# EAGLE board cameraCableBoardPanelized (EAGLE 9.4.2)
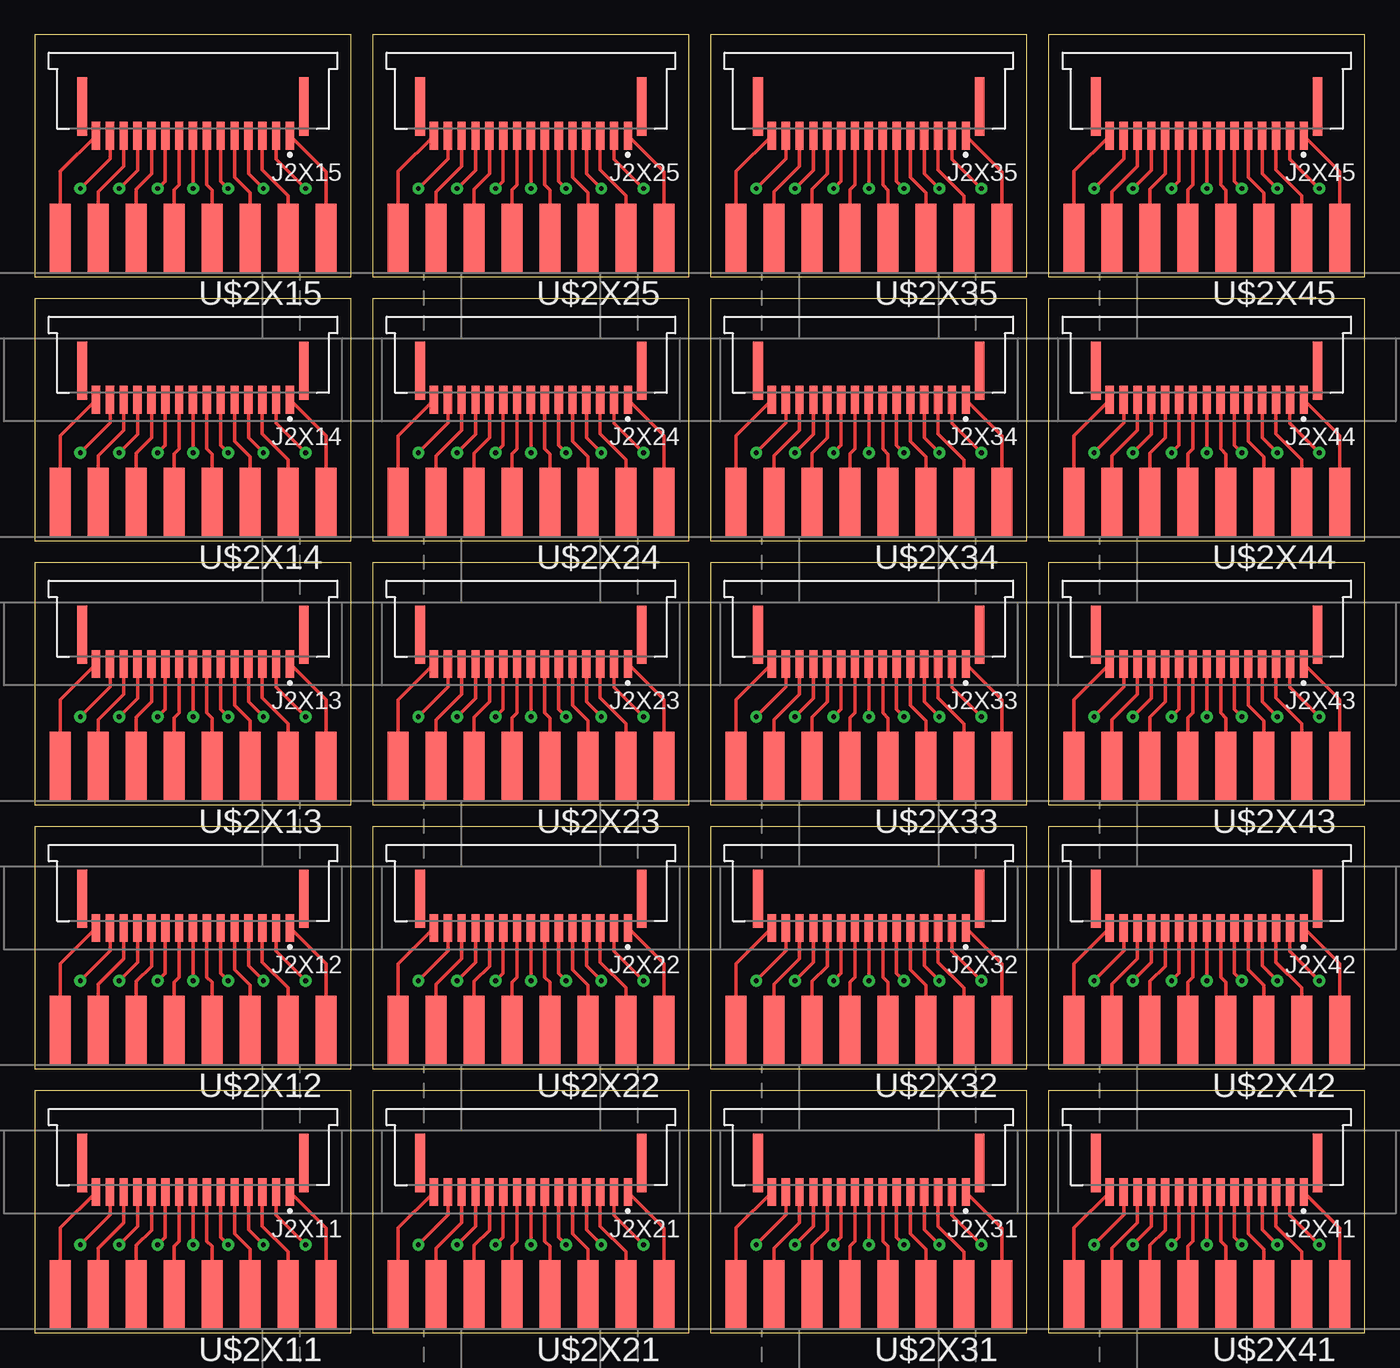
[diagram p0: board, top side]
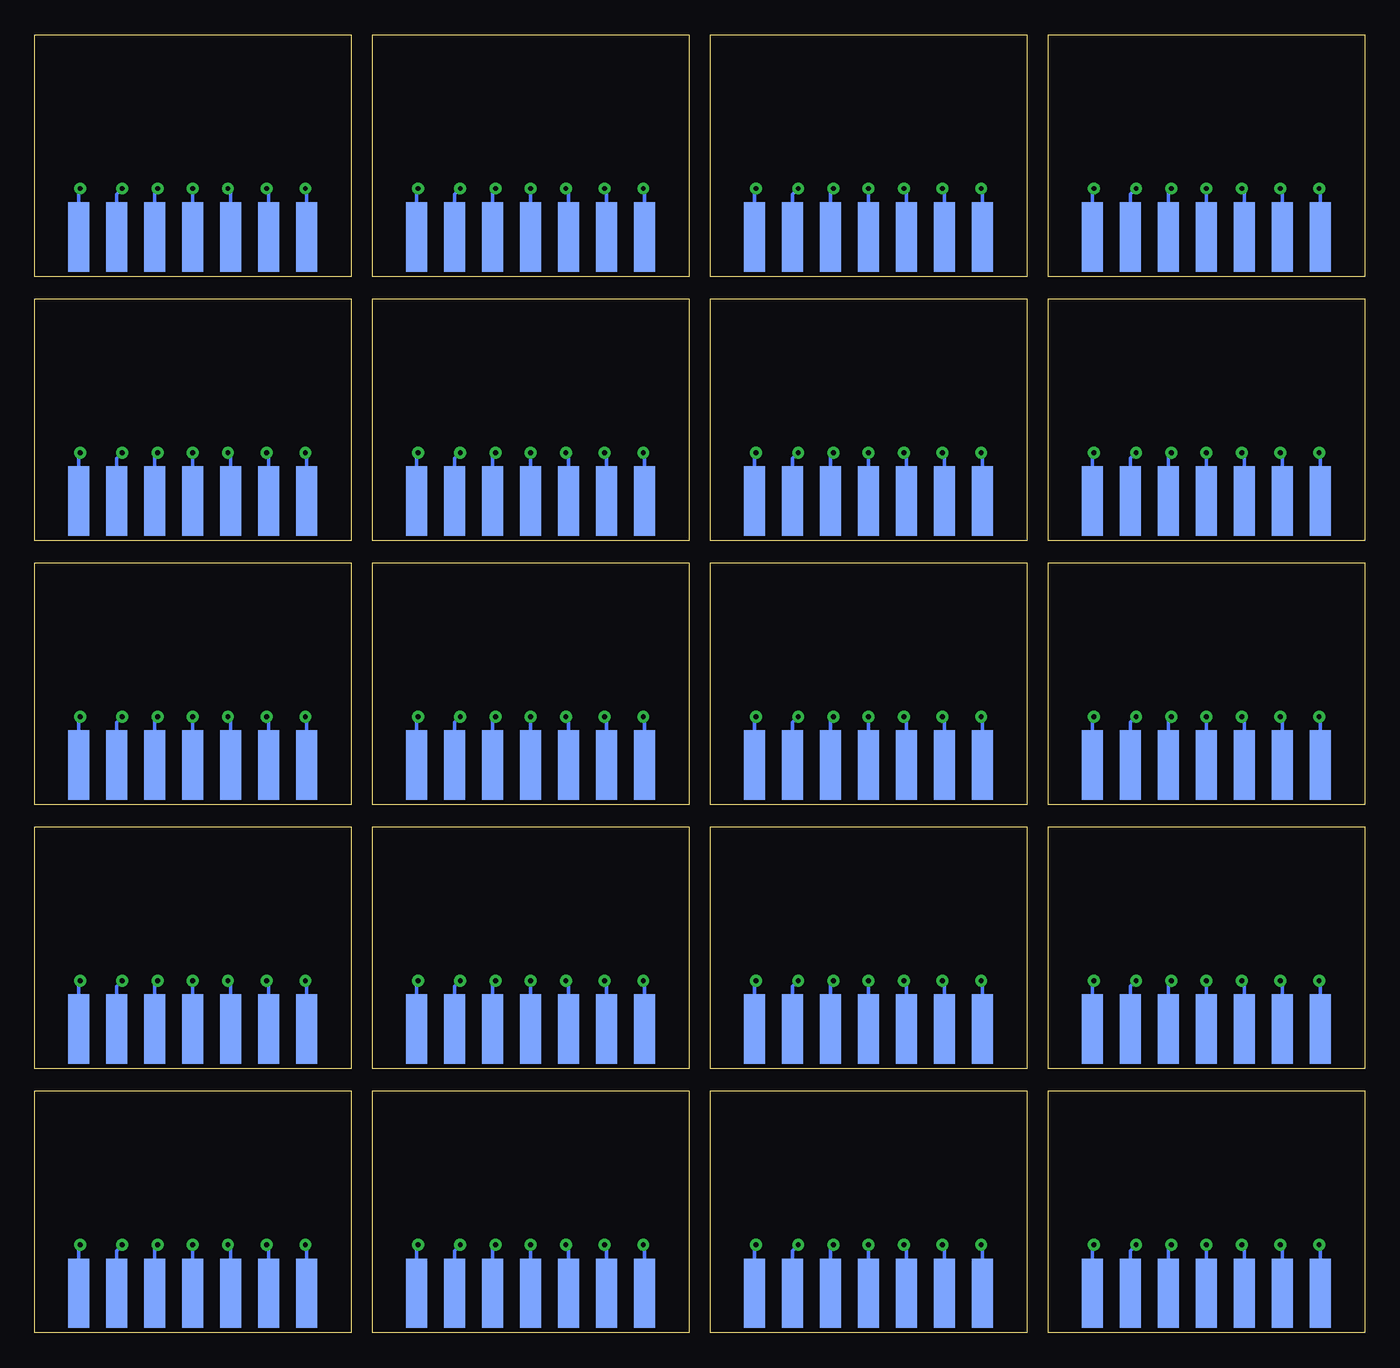
[diagram p1: board, bottom side, seen from below]

Size 95.99 x 93.65 mm. Coordinates in mm from the lower left corner, seen from the top.
Outline: 0,0 22.84,0 22.84,17.45 0,17.45 0,0
Outline: 0,19.05 22.84,19.05 22.84,36.5 0,36.5 0,19.05
Outline: 0,38.1 22.84,38.1 22.84,55.55 0,55.55 0,38.1
Outline: 0,57.15 22.84,57.15 22.84,74.6 0,74.6 0,57.15
Outline: 0,76.2 22.84,76.2 22.84,93.65 0,93.65 0,76.2
Outline: 24.38,0 47.22,0 47.22,17.45 24.38,17.45 24.38,0
Outline: 24.38,19.05 47.22,19.05 47.22,36.5 24.38,36.5 24.38,19.05
Outline: 24.38,38.1 47.22,38.1 47.22,55.55 24.38,55.55 24.38,38.1
Outline: 24.38,57.15 47.22,57.15 47.22,74.6 24.38,74.6 24.38,57.15
Outline: 24.38,76.2 47.22,76.2 47.22,93.65 24.38,93.65 24.38,76.2
Outline: 48.77,0 71.61,0 71.61,17.45 48.77,17.45 48.77,0
Outline: 48.77,19.05 71.61,19.05 71.61,36.5 48.77,36.5 48.77,19.05
Outline: 48.77,38.1 71.61,38.1 71.61,55.55 48.77,55.55 48.77,38.1
Outline: 48.77,57.15 71.61,57.15 71.61,74.6 48.77,74.6 48.77,57.15
Outline: 48.77,76.2 71.61,76.2 71.61,93.65 48.77,93.65 48.77,76.2
Outline: 73.15,0 95.99,0 95.99,17.45 73.15,17.45 73.15,0
Outline: 73.15,19.05 95.99,19.05 95.99,36.5 73.15,36.5 73.15,19.05
Outline: 73.15,38.1 95.99,38.1 95.99,55.55 73.15,55.55 73.15,38.1
Outline: 73.15,57.15 95.99,57.15 95.99,74.6 73.15,74.6 73.15,57.15
Outline: 73.15,76.2 95.99,76.2 95.99,93.65 73.15,93.65 73.15,76.2
Copper layers (1*16): Top 0.035mm / dielectric 1.5mm / Bottom 0.035mm
Design rules "SparkFun-2-layer-STANDARD_13milDrill": minimum track width 10mil, minimum drill 13mil, track to track 10mil, track to pad 8mil, pad to pad 8mil, via to via 10mil, smd to smd 8mil, copper to edge 8mil, drill to drill 8mil, minimum pad ring 10mil, minimum via ring 10mil, stop-mask expansion 4mil, vias tented up to drill 25mil, thermal gap 10mil

## Footprints (pad centres in the part's own frame; a part is rotated, then mirrored left to right if it is on the bottom)
AMPHENOL_SFW15R-1STE1LF = smd 0.6 x 2: 1 -7,0; 2 -6,0; 3 -5,0; 4 -4,0; 5 -3,0; 6 -2,0; 7 -1,0; 8 0,0; 9 1,0; 10 2,0; 11 3,0; 12 4,0; 13 5,0; 14 6,0; 15 7,0 | smd 0.7 x 4.2: S1 -8,-2.1; S2 8,-2.1
DB15-BOARD-EDGE = smd 1.5 x 5: P1 9.58,-2.5; P2 6.84,-2.5; P3 4.1,-2.5; P4 1.36,-2.5; P5 -1.38,-2.5; P6 -4.12,-2.5; P7 -6.86,-2.5; P8 -9.6,-2.5 | smd 1.5 x 5 bottom: P9 8.21,-2.61; P10 5.47,-2.61; P11 2.73,-2.61; P12 -0.01,-2.61; P13 -2.75,-2.61; P14 -5.49,-2.61; P15 -8.23,-2.61

## Placement (x,y rotation side)
J2X11  [AMPHENOL_SFW15R-1STE1LF]  11.43,10.16 180 top
J2X12  [AMPHENOL_SFW15R-1STE1LF]  11.43,29.21 180 top
J2X13  [AMPHENOL_SFW15R-1STE1LF]  11.43,48.26 180 top
J2X14  [AMPHENOL_SFW15R-1STE1LF]  11.43,67.31 180 top
J2X15  [AMPHENOL_SFW15R-1STE1LF]  11.43,86.36 180 top
J2X21  [AMPHENOL_SFW15R-1STE1LF]  35.81,10.16 180 top
J2X22  [AMPHENOL_SFW15R-1STE1LF]  35.81,29.21 180 top
J2X23  [AMPHENOL_SFW15R-1STE1LF]  35.81,48.26 180 top
J2X24  [AMPHENOL_SFW15R-1STE1LF]  35.81,67.31 180 top
J2X25  [AMPHENOL_SFW15R-1STE1LF]  35.81,86.36 180 top
J2X31  [AMPHENOL_SFW15R-1STE1LF]  60.2,10.16 180 top
J2X32  [AMPHENOL_SFW15R-1STE1LF]  60.2,29.21 180 top
J2X33  [AMPHENOL_SFW15R-1STE1LF]  60.2,48.26 180 top
J2X34  [AMPHENOL_SFW15R-1STE1LF]  60.2,67.31 180 top
J2X35  [AMPHENOL_SFW15R-1STE1LF]  60.2,86.36 180 top
J2X41  [AMPHENOL_SFW15R-1STE1LF]  84.58,10.16 180 top
J2X42  [AMPHENOL_SFW15R-1STE1LF]  84.58,29.21 180 top
J2X43  [AMPHENOL_SFW15R-1STE1LF]  84.58,48.26 180 top
J2X44  [AMPHENOL_SFW15R-1STE1LF]  84.58,67.31 180 top
J2X45  [AMPHENOL_SFW15R-1STE1LF]  84.58,86.36 180 top
U$2X11  [DB15-BOARD-EDGE]  11.43,0.25 180 top
U$2X12  [DB15-BOARD-EDGE]  11.43,19.3 180 top
U$2X13  [DB15-BOARD-EDGE]  11.43,38.35 180 top
U$2X14  [DB15-BOARD-EDGE]  11.43,57.4 180 top
U$2X15  [DB15-BOARD-EDGE]  11.43,76.45 180 top
U$2X21  [DB15-BOARD-EDGE]  35.81,0.25 180 top
U$2X22  [DB15-BOARD-EDGE]  35.81,19.3 180 top
U$2X23  [DB15-BOARD-EDGE]  35.81,38.35 180 top
U$2X24  [DB15-BOARD-EDGE]  35.81,57.4 180 top
U$2X25  [DB15-BOARD-EDGE]  35.81,76.45 180 top
U$2X31  [DB15-BOARD-EDGE]  60.2,0.25 180 top
U$2X32  [DB15-BOARD-EDGE]  60.2,19.3 180 top
U$2X33  [DB15-BOARD-EDGE]  60.2,38.35 180 top
U$2X34  [DB15-BOARD-EDGE]  60.2,57.4 180 top
U$2X35  [DB15-BOARD-EDGE]  60.2,76.45 180 top
U$2X41  [DB15-BOARD-EDGE]  84.58,0.25 180 top
U$2X42  [DB15-BOARD-EDGE]  84.58,19.3 180 top
U$2X43  [DB15-BOARD-EDGE]  84.58,38.35 180 top
U$2X44  [DB15-BOARD-EDGE]  84.58,57.4 180 top
U$2X45  [DB15-BOARD-EDGE]  84.58,76.45 180 top

## Library data of the parts
J2X11-J2X15 J2X21-J2X25 J2X31-J2X35 J2X41-J2X45 U$2X11-U$2X15 U$2X21-U$2X25 U$2X31-U$2X35 U$2X41-U$2X45 = RPi-Parts

## Nets
CAM1X11: J2X11.1 U$2X11.P8
CAM1X12: J2X12.1 U$2X12.P8
CAM1X13: J2X13.1 U$2X13.P8
CAM1X14: J2X14.1 U$2X14.P8
CAM1X15: J2X15.1 U$2X15.P8
CAM1X21: J2X21.1 U$2X21.P8
CAM1X22: J2X22.1 U$2X22.P8
CAM1X23: J2X23.1 U$2X23.P8
CAM1X24: J2X24.1 U$2X24.P8
CAM1X25: J2X25.1 U$2X25.P8
CAM1X31: J2X31.1 U$2X31.P8
CAM1X32: J2X32.1 U$2X32.P8
CAM1X33: J2X33.1 U$2X33.P8
CAM1X34: J2X34.1 U$2X34.P8
CAM1X35: J2X35.1 U$2X35.P8
CAM1X41: J2X41.1 U$2X41.P8
CAM1X42: J2X42.1 U$2X42.P8
CAM1X43: J2X43.1 U$2X43.P8
CAM1X44: J2X44.1 U$2X44.P8
CAM1X45: J2X45.1 U$2X45.P8
CAM2X11: J2X11.2 U$2X11.P15
CAM2X12: J2X12.2 U$2X12.P15
CAM2X13: J2X13.2 U$2X13.P15
CAM2X14: J2X14.2 U$2X14.P15
CAM2X15: J2X15.2 U$2X15.P15
CAM2X21: J2X21.2 U$2X21.P15
CAM2X22: J2X22.2 U$2X22.P15
CAM2X23: J2X23.2 U$2X23.P15
CAM2X24: J2X24.2 U$2X24.P15
CAM2X25: J2X25.2 U$2X25.P15
CAM2X31: J2X31.2 U$2X31.P15
CAM2X32: J2X32.2 U$2X32.P15
CAM2X33: J2X33.2 U$2X33.P15
CAM2X34: J2X34.2 U$2X34.P15
CAM2X35: J2X35.2 U$2X35.P15
CAM2X41: J2X41.2 U$2X41.P15
CAM2X42: J2X42.2 U$2X42.P15
CAM2X43: J2X43.2 U$2X43.P15
CAM2X44: J2X44.2 U$2X44.P15
CAM2X45: J2X45.2 U$2X45.P15
CAM3X11: J2X11.3 U$2X11.P7
CAM3X12: J2X12.3 U$2X12.P7
CAM3X13: J2X13.3 U$2X13.P7
CAM3X14: J2X14.3 U$2X14.P7
CAM3X15: J2X15.3 U$2X15.P7
CAM3X21: J2X21.3 U$2X21.P7
CAM3X22: J2X22.3 U$2X22.P7
CAM3X23: J2X23.3 U$2X23.P7
CAM3X24: J2X24.3 U$2X24.P7
CAM3X25: J2X25.3 U$2X25.P7
CAM3X31: J2X31.3 U$2X31.P7
CAM3X32: J2X32.3 U$2X32.P7
CAM3X33: J2X33.3 U$2X33.P7
CAM3X34: J2X34.3 U$2X34.P7
CAM3X35: J2X35.3 U$2X35.P7
CAM3X41: J2X41.3 U$2X41.P7
CAM3X42: J2X42.3 U$2X42.P7
CAM3X43: J2X43.3 U$2X43.P7
CAM3X44: J2X44.3 U$2X44.P7
CAM3X45: J2X45.3 U$2X45.P7
CAM4X11: J2X11.4 U$2X11.P14
CAM4X12: J2X12.4 U$2X12.P14
CAM4X13: J2X13.4 U$2X13.P14
CAM4X14: J2X14.4 U$2X14.P14
CAM4X15: J2X15.4 U$2X15.P14
CAM4X21: J2X21.4 U$2X21.P14
CAM4X22: J2X22.4 U$2X22.P14
CAM4X23: J2X23.4 U$2X23.P14
CAM4X24: J2X24.4 U$2X24.P14
CAM4X25: J2X25.4 U$2X25.P14
CAM4X31: J2X31.4 U$2X31.P14
CAM4X32: J2X32.4 U$2X32.P14
CAM4X33: J2X33.4 U$2X33.P14
CAM4X34: J2X34.4 U$2X34.P14
CAM4X35: J2X35.4 U$2X35.P14
CAM4X41: J2X41.4 U$2X41.P14
CAM4X42: J2X42.4 U$2X42.P14
CAM4X43: J2X43.4 U$2X43.P14
CAM4X44: J2X44.4 U$2X44.P14
CAM4X45: J2X45.4 U$2X45.P14
CAM5X11: J2X11.5 U$2X11.P6
CAM5X12: J2X12.5 U$2X12.P6
CAM5X13: J2X13.5 U$2X13.P6
CAM5X14: J2X14.5 U$2X14.P6
CAM5X15: J2X15.5 U$2X15.P6
CAM5X21: J2X21.5 U$2X21.P6
CAM5X22: J2X22.5 U$2X22.P6
CAM5X23: J2X23.5 U$2X23.P6
CAM5X24: J2X24.5 U$2X24.P6
CAM5X25: J2X25.5 U$2X25.P6
CAM5X31: J2X31.5 U$2X31.P6
CAM5X32: J2X32.5 U$2X32.P6
CAM5X33: J2X33.5 U$2X33.P6
CAM5X34: J2X34.5 U$2X34.P6
CAM5X35: J2X35.5 U$2X35.P6
CAM5X41: J2X41.5 U$2X41.P6
CAM5X42: J2X42.5 U$2X42.P6
CAM5X43: J2X43.5 U$2X43.P6
CAM5X44: J2X44.5 U$2X44.P6
CAM5X45: J2X45.5 U$2X45.P6
CAM6X11: J2X11.6 U$2X11.P13
CAM6X12: J2X12.6 U$2X12.P13
CAM6X13: J2X13.6 U$2X13.P13
CAM6X14: J2X14.6 U$2X14.P13
CAM6X15: J2X15.6 U$2X15.P13
CAM6X21: J2X21.6 U$2X21.P13
CAM6X22: J2X22.6 U$2X22.P13
CAM6X23: J2X23.6 U$2X23.P13
CAM6X24: J2X24.6 U$2X24.P13
CAM6X25: J2X25.6 U$2X25.P13
CAM6X31: J2X31.6 U$2X31.P13
CAM6X32: J2X32.6 U$2X32.P13
CAM6X33: J2X33.6 U$2X33.P13
CAM6X34: J2X34.6 U$2X34.P13
CAM6X35: J2X35.6 U$2X35.P13
CAM6X41: J2X41.6 U$2X41.P13
CAM6X42: J2X42.6 U$2X42.P13
CAM6X43: J2X43.6 U$2X43.P13
CAM6X44: J2X44.6 U$2X44.P13
CAM6X45: J2X45.6 U$2X45.P13
CAM7X11: J2X11.7 U$2X11.P5
CAM7X12: J2X12.7 U$2X12.P5
CAM7X13: J2X13.7 U$2X13.P5
CAM7X14: J2X14.7 U$2X14.P5
CAM7X15: J2X15.7 U$2X15.P5
CAM7X21: J2X21.7 U$2X21.P5
CAM7X22: J2X22.7 U$2X22.P5
CAM7X23: J2X23.7 U$2X23.P5
CAM7X24: J2X24.7 U$2X24.P5
CAM7X25: J2X25.7 U$2X25.P5
CAM7X31: J2X31.7 U$2X31.P5
CAM7X32: J2X32.7 U$2X32.P5
CAM7X33: J2X33.7 U$2X33.P5
CAM7X34: J2X34.7 U$2X34.P5
CAM7X35: J2X35.7 U$2X35.P5
CAM7X41: J2X41.7 U$2X41.P5
CAM7X42: J2X42.7 U$2X42.P5
CAM7X43: J2X43.7 U$2X43.P5
CAM7X44: J2X44.7 U$2X44.P5
CAM7X45: J2X45.7 U$2X45.P5
CAM8X11: J2X11.8 U$2X11.P12
CAM8X12: J2X12.8 U$2X12.P12
CAM8X13: J2X13.8 U$2X13.P12
CAM8X14: J2X14.8 U$2X14.P12
CAM8X15: J2X15.8 U$2X15.P12
CAM8X21: J2X21.8 U$2X21.P12
CAM8X22: J2X22.8 U$2X22.P12
CAM8X23: J2X23.8 U$2X23.P12
CAM8X24: J2X24.8 U$2X24.P12
CAM8X25: J2X25.8 U$2X25.P12
CAM8X31: J2X31.8 U$2X31.P12
CAM8X32: J2X32.8 U$2X32.P12
CAM8X33: J2X33.8 U$2X33.P12
CAM8X34: J2X34.8 U$2X34.P12
CAM8X35: J2X35.8 U$2X35.P12
CAM8X41: J2X41.8 U$2X41.P12
CAM8X42: J2X42.8 U$2X42.P12
CAM8X43: J2X43.8 U$2X43.P12
CAM8X44: J2X44.8 U$2X44.P12
CAM8X45: J2X45.8 U$2X45.P12
CAM9X11: J2X11.9 U$2X11.P4
CAM9X12: J2X12.9 U$2X12.P4
CAM9X13: J2X13.9 U$2X13.P4
CAM9X14: J2X14.9 U$2X14.P4
CAM9X15: J2X15.9 U$2X15.P4
CAM9X21: J2X21.9 U$2X21.P4
CAM9X22: J2X22.9 U$2X22.P4
CAM9X23: J2X23.9 U$2X23.P4
CAM9X24: J2X24.9 U$2X24.P4
CAM9X25: J2X25.9 U$2X25.P4
CAM9X31: J2X31.9 U$2X31.P4
CAM9X32: J2X32.9 U$2X32.P4
CAM9X33: J2X33.9 U$2X33.P4
CAM9X34: J2X34.9 U$2X34.P4
CAM9X35: J2X35.9 U$2X35.P4
CAM9X41: J2X41.9 U$2X41.P4
CAM9X42: J2X42.9 U$2X42.P4
CAM9X43: J2X43.9 U$2X43.P4
CAM9X44: J2X44.9 U$2X44.P4
CAM9X45: J2X45.9 U$2X45.P4
CAM10X11: J2X11.10 U$2X11.P11
CAM10X12: J2X12.10 U$2X12.P11
CAM10X13: J2X13.10 U$2X13.P11
CAM10X14: J2X14.10 U$2X14.P11
CAM10X15: J2X15.10 U$2X15.P11
CAM10X21: J2X21.10 U$2X21.P11
CAM10X22: J2X22.10 U$2X22.P11
CAM10X23: J2X23.10 U$2X23.P11
CAM10X24: J2X24.10 U$2X24.P11
CAM10X25: J2X25.10 U$2X25.P11
CAM10X31: J2X31.10 U$2X31.P11
CAM10X32: J2X32.10 U$2X32.P11
CAM10X33: J2X33.10 U$2X33.P11
CAM10X34: J2X34.10 U$2X34.P11
CAM10X35: J2X35.10 U$2X35.P11
CAM10X41: J2X41.10 U$2X41.P11
CAM10X42: J2X42.10 U$2X42.P11
CAM10X43: J2X43.10 U$2X43.P11
CAM10X44: J2X44.10 U$2X44.P11
CAM10X45: J2X45.10 U$2X45.P11
CAM11X11: J2X11.11 U$2X11.P3
CAM11X12: J2X12.11 U$2X12.P3
CAM11X13: J2X13.11 U$2X13.P3
CAM11X14: J2X14.11 U$2X14.P3
CAM11X15: J2X15.11 U$2X15.P3
CAM11X21: J2X21.11 U$2X21.P3
CAM11X22: J2X22.11 U$2X22.P3
CAM11X23: J2X23.11 U$2X23.P3
CAM11X24: J2X24.11 U$2X24.P3
CAM11X25: J2X25.11 U$2X25.P3
CAM11X31: J2X31.11 U$2X31.P3
CAM11X32: J2X32.11 U$2X32.P3
CAM11X33: J2X33.11 U$2X33.P3
CAM11X34: J2X34.11 U$2X34.P3
CAM11X35: J2X35.11 U$2X35.P3
CAM11X41: J2X41.11 U$2X41.P3
CAM11X42: J2X42.11 U$2X42.P3
CAM11X43: J2X43.11 U$2X43.P3
CAM11X44: J2X44.11 U$2X44.P3
CAM11X45: J2X45.11 U$2X45.P3
CAM12X11: J2X11.12 U$2X11.P10
CAM12X12: J2X12.12 U$2X12.P10
CAM12X13: J2X13.12 U$2X13.P10
CAM12X14: J2X14.12 U$2X14.P10
CAM12X15: J2X15.12 U$2X15.P10
CAM12X21: J2X21.12 U$2X21.P10
CAM12X22: J2X22.12 U$2X22.P10
CAM12X23: J2X23.12 U$2X23.P10
CAM12X24: J2X24.12 U$2X24.P10
CAM12X25: J2X25.12 U$2X25.P10
CAM12X31: J2X31.12 U$2X31.P10
CAM12X32: J2X32.12 U$2X32.P10
CAM12X33: J2X33.12 U$2X33.P10
CAM12X34: J2X34.12 U$2X34.P10
CAM12X35: J2X35.12 U$2X35.P10
CAM12X41: J2X41.12 U$2X41.P10
CAM12X42: J2X42.12 U$2X42.P10
CAM12X43: J2X43.12 U$2X43.P10
CAM12X44: J2X44.12 U$2X44.P10
CAM12X45: J2X45.12 U$2X45.P10
CAM13X11: J2X11.13 U$2X11.P2
CAM13X12: J2X12.13 U$2X12.P2
CAM13X13: J2X13.13 U$2X13.P2
CAM13X14: J2X14.13 U$2X14.P2
CAM13X15: J2X15.13 U$2X15.P2
CAM13X21: J2X21.13 U$2X21.P2
CAM13X22: J2X22.13 U$2X22.P2
CAM13X23: J2X23.13 U$2X23.P2
CAM13X24: J2X24.13 U$2X24.P2
CAM13X25: J2X25.13 U$2X25.P2
CAM13X31: J2X31.13 U$2X31.P2
CAM13X32: J2X32.13 U$2X32.P2
CAM13X33: J2X33.13 U$2X33.P2
CAM13X34: J2X34.13 U$2X34.P2
CAM13X35: J2X35.13 U$2X35.P2
CAM13X41: J2X41.13 U$2X41.P2
CAM13X42: J2X42.13 U$2X42.P2
CAM13X43: J2X43.13 U$2X43.P2
CAM13X44: J2X44.13 U$2X44.P2
CAM13X45: J2X45.13 U$2X45.P2
CAM14X11: J2X11.14 U$2X11.P9
CAM14X12: J2X12.14 U$2X12.P9
CAM14X13: J2X13.14 U$2X13.P9
CAM14X14: J2X14.14 U$2X14.P9
CAM14X15: J2X15.14 U$2X15.P9
CAM14X21: J2X21.14 U$2X21.P9
CAM14X22: J2X22.14 U$2X22.P9
CAM14X23: J2X23.14 U$2X23.P9
CAM14X24: J2X24.14 U$2X24.P9
CAM14X25: J2X25.14 U$2X25.P9
CAM14X31: J2X31.14 U$2X31.P9
CAM14X32: J2X32.14 U$2X32.P9
CAM14X33: J2X33.14 U$2X33.P9
CAM14X34: J2X34.14 U$2X34.P9
CAM14X35: J2X35.14 U$2X35.P9
CAM14X41: J2X41.14 U$2X41.P9
CAM14X42: J2X42.14 U$2X42.P9
CAM14X43: J2X43.14 U$2X43.P9
CAM14X44: J2X44.14 U$2X44.P9
CAM14X45: J2X45.14 U$2X45.P9
CAM15X11: J2X11.15 U$2X11.P1
CAM15X12: J2X12.15 U$2X12.P1
CAM15X13: J2X13.15 U$2X13.P1
CAM15X14: J2X14.15 U$2X14.P1
CAM15X15: J2X15.15 U$2X15.P1
CAM15X21: J2X21.15 U$2X21.P1
CAM15X22: J2X22.15 U$2X22.P1
CAM15X23: J2X23.15 U$2X23.P1
CAM15X24: J2X24.15 U$2X24.P1
CAM15X25: J2X25.15 U$2X25.P1
CAM15X31: J2X31.15 U$2X31.P1
CAM15X32: J2X32.15 U$2X32.P1
CAM15X33: J2X33.15 U$2X33.P1
CAM15X34: J2X34.15 U$2X34.P1
CAM15X35: J2X35.15 U$2X35.P1
CAM15X41: J2X41.15 U$2X41.P1
CAM15X42: J2X42.15 U$2X42.P1
CAM15X43: J2X43.15 U$2X43.P1
CAM15X44: J2X44.15 U$2X44.P1
CAM15X45: J2X45.15 U$2X45.P1

## Tracks (layer width: path | path; a pad name or v marks a point on that pad's centre or on a via)
CAM1X11
  Top 0.254: U$2X11.P8 21.03,7.56 J2X11.1
CAM1X12
  Top 0.254: U$2X12.P8 21.03,26.61 J2X12.1
CAM1X13
  Top 0.254: U$2X13.P8 21.03,45.66 J2X13.1
CAM1X14
  Top 0.254: U$2X14.P8 21.03,64.71 J2X14.1
CAM1X15
  Top 0.254: U$2X15.P8 21.03,83.76 J2X15.1
CAM1X21
  Top 0.254: U$2X21.P8 45.41,7.56 J2X21.1
CAM1X22
  Top 0.254: U$2X22.P8 45.41,26.61 J2X22.1
CAM1X23
  Top 0.254: U$2X23.P8 45.41,45.66 J2X23.1
CAM1X24
  Top 0.254: U$2X24.P8 45.41,64.71 J2X24.1
CAM1X25
  Top 0.254: U$2X25.P8 45.41,83.76 J2X25.1
CAM1X31
  Top 0.254: U$2X31.P8 69.8,7.56 J2X31.1
CAM1X32
  Top 0.254: U$2X32.P8 69.8,26.61 J2X32.1
CAM1X33
  Top 0.254: U$2X33.P8 69.8,45.66 J2X33.1
CAM1X34
  Top 0.254: U$2X34.P8 69.8,64.71 J2X34.1
CAM1X35
  Top 0.254: U$2X35.P8 69.8,83.76 J2X35.1
CAM1X41
  Top 0.254: U$2X41.P8 94.18,7.56 J2X41.1
CAM1X42
  Top 0.254: U$2X42.P8 94.18,26.61 J2X42.1
CAM1X43
  Top 0.254: U$2X43.P8 94.18,45.66 J2X43.1
CAM1X44
  Top 0.254: U$2X44.P8 94.18,64.71 J2X44.1
CAM1X45
  Top 0.254: U$2X45.P8 94.18,83.76 J2X45.1
CAM2X11  (via drill 0.35 pad 0.86)
  Top 0.254: v19.56,6.35 17.43,8.48 J2X11.2
  Bottom 0.254: U$2X11.P15 19.66,6.25 v19.56,6.35
CAM2X12  (via drill 0.35 pad 0.86)
  Top 0.254: v19.56,25.4 17.43,27.53 J2X12.2
  Bottom 0.254: U$2X12.P15 19.66,25.3 v19.56,25.4
CAM2X13  (via drill 0.35 pad 0.86)
  Top 0.254: v19.56,44.45 17.43,46.58 J2X13.2
  Bottom 0.254: U$2X13.P15 19.66,44.35 v19.56,44.45
CAM2X14  (via drill 0.35 pad 0.86)
  Top 0.254: v19.56,63.5 17.43,65.63 J2X14.2
  Bottom 0.254: U$2X14.P15 19.66,63.4 v19.56,63.5
CAM2X15  (via drill 0.35 pad 0.86)
  Top 0.254: v19.56,82.55 17.43,84.68 J2X15.2
  Bottom 0.254: U$2X15.P15 19.66,82.45 v19.56,82.55
CAM2X21  (via drill 0.35 pad 0.86)
  Top 0.254: v43.94,6.35 41.81,8.48 J2X21.2
  Bottom 0.254: U$2X21.P15 44.04,6.25 v43.94,6.35
CAM2X22  (via drill 0.35 pad 0.86)
  Top 0.254: v43.94,25.4 41.81,27.53 J2X22.2
  Bottom 0.254: U$2X22.P15 44.04,25.3 v43.94,25.4
CAM2X23  (via drill 0.35 pad 0.86)
  Top 0.254: v43.94,44.45 41.81,46.58 J2X23.2
  Bottom 0.254: U$2X23.P15 44.04,44.35 v43.94,44.45
CAM2X24  (via drill 0.35 pad 0.86)
  Top 0.254: v43.94,63.5 41.81,65.63 J2X24.2
  Bottom 0.254: U$2X24.P15 44.04,63.4 v43.94,63.5
CAM2X25  (via drill 0.35 pad 0.86)
  Top 0.254: v43.94,82.55 41.81,84.68 J2X25.2
  Bottom 0.254: U$2X25.P15 44.04,82.45 v43.94,82.55
CAM2X31  (via drill 0.35 pad 0.86)
  Top 0.254: v68.33,6.35 66.2,8.48 J2X31.2
  Bottom 0.254: U$2X31.P15 68.43,6.25 v68.33,6.35
CAM2X32  (via drill 0.35 pad 0.86)
  Top 0.254: v68.33,25.4 66.2,27.53 J2X32.2
  Bottom 0.254: U$2X32.P15 68.43,25.3 v68.33,25.4
CAM2X33  (via drill 0.35 pad 0.86)
  Top 0.254: v68.33,44.45 66.2,46.58 J2X33.2
  Bottom 0.254: U$2X33.P15 68.43,44.35 v68.33,44.45
CAM2X34  (via drill 0.35 pad 0.86)
  Top 0.254: v68.33,63.5 66.2,65.63 J2X34.2
  Bottom 0.254: U$2X34.P15 68.43,63.4 v68.33,63.5
CAM2X35  (via drill 0.35 pad 0.86)
  Top 0.254: v68.33,82.55 66.2,84.68 J2X35.2
  Bottom 0.254: U$2X35.P15 68.43,82.45 v68.33,82.55
CAM2X41  (via drill 0.35 pad 0.86)
  Top 0.254: v92.71,6.35 90.58,8.48 J2X41.2
  Bottom 0.254: U$2X41.P15 92.81,6.25 v92.71,6.35
CAM2X42  (via drill 0.35 pad 0.86)
  Top 0.254: v92.71,25.4 90.58,27.53 J2X42.2
  Bottom 0.254: U$2X42.P15 92.81,25.3 v92.71,25.4
CAM2X43  (via drill 0.35 pad 0.86)
  Top 0.254: v92.71,44.45 90.58,46.58 J2X43.2
  Bottom 0.254: U$2X43.P15 92.81,44.35 v92.71,44.45
CAM2X44  (via drill 0.35 pad 0.86)
  Top 0.254: v92.71,63.5 90.58,65.63 J2X44.2
  Bottom 0.254: U$2X44.P15 92.81,63.4 v92.71,63.5
CAM2X45  (via drill 0.35 pad 0.86)
  Top 0.254: v92.71,82.55 90.58,84.68 J2X45.2
  Bottom 0.254: U$2X45.P15 92.81,82.45 v92.71,82.55
CAM3X11
  Top 0.254: U$2X11.P7 18.29,5.84 16.43,7.7 J2X11.3
CAM3X12
  Top 0.254: U$2X12.P7 18.29,24.89 16.43,26.75 J2X12.3
CAM3X13
  Top 0.254: U$2X13.P7 18.29,43.94 16.43,45.8 J2X13.3
CAM3X14
  Top 0.254: U$2X14.P7 18.29,62.99 16.43,64.85 J2X14.3
CAM3X15
  Top 0.254: U$2X15.P7 18.29,82.04 16.43,83.9 J2X15.3
CAM3X21
  Top 0.254: U$2X21.P7 42.67,5.84 40.81,7.7 J2X21.3
CAM3X22
  Top 0.254: U$2X22.P7 42.67,24.89 40.81,26.75 J2X22.3
CAM3X23
  Top 0.254: U$2X23.P7 42.67,43.94 40.81,45.8 J2X23.3
CAM3X24
  Top 0.254: U$2X24.P7 42.67,62.99 40.81,64.85 J2X24.3
CAM3X25
  Top 0.254: U$2X25.P7 42.67,82.04 40.81,83.9 J2X25.3
CAM3X31
  Top 0.254: U$2X31.P7 67.06,5.84 65.2,7.7 J2X31.3
CAM3X32
  Top 0.254: U$2X32.P7 67.06,24.89 65.2,26.75 J2X32.3
CAM3X33
  Top 0.254: U$2X33.P7 67.06,43.94 65.2,45.8 J2X33.3
CAM3X34
  Top 0.254: U$2X34.P7 67.06,62.99 65.2,64.85 J2X34.3
CAM3X35
  Top 0.254: U$2X35.P7 67.06,82.04 65.2,83.9 J2X35.3
CAM3X41
  Top 0.254: U$2X41.P7 91.44,5.84 89.58,7.7 J2X41.3
CAM3X42
  Top 0.254: U$2X42.P7 91.44,24.89 89.58,26.75 J2X42.3
CAM3X43
  Top 0.254: U$2X43.P7 91.44,43.94 89.58,45.8 J2X43.3
CAM3X44
  Top 0.254: U$2X44.P7 91.44,62.99 89.58,64.85 J2X44.3
CAM3X45
  Top 0.254: U$2X45.P7 91.44,82.04 89.58,83.9 J2X45.3
CAM4X11  (via drill 0.35 pad 0.86)
  Top 0.254: v16.51,6.35 15.43,7.43 J2X11.4
  Bottom 0.254: U$2X11.P14 16.92,5.94 v16.51,6.35
CAM4X12  (via drill 0.35 pad 0.86)
  Top 0.254: v16.51,25.4 15.43,26.48 J2X12.4
  Bottom 0.254: U$2X12.P14 16.92,24.99 v16.51,25.4
CAM4X13  (via drill 0.35 pad 0.86)
  Top 0.254: v16.51,44.45 15.43,45.53 J2X13.4
  Bottom 0.254: U$2X13.P14 16.92,44.04 v16.51,44.45
CAM4X14  (via drill 0.35 pad 0.86)
  Top 0.254: v16.51,63.5 15.43,64.58 J2X14.4
  Bottom 0.254: U$2X14.P14 16.92,63.09 v16.51,63.5
CAM4X15  (via drill 0.35 pad 0.86)
  Top 0.254: v16.51,82.55 15.43,83.63 J2X15.4
  Bottom 0.254: U$2X15.P14 16.92,82.14 v16.51,82.55
CAM4X21  (via drill 0.35 pad 0.86)
  Top 0.254: v40.89,6.35 39.81,7.43 J2X21.4
  Bottom 0.254: U$2X21.P14 41.3,5.94 v40.89,6.35
CAM4X22  (via drill 0.35 pad 0.86)
  Top 0.254: v40.89,25.4 39.81,26.48 J2X22.4
  Bottom 0.254: U$2X22.P14 41.3,24.99 v40.89,25.4
CAM4X23  (via drill 0.35 pad 0.86)
  Top 0.254: v40.89,44.45 39.81,45.53 J2X23.4
  Bottom 0.254: U$2X23.P14 41.3,44.04 v40.89,44.45
CAM4X24  (via drill 0.35 pad 0.86)
  Top 0.254: v40.89,63.5 39.81,64.58 J2X24.4
  Bottom 0.254: U$2X24.P14 41.3,63.09 v40.89,63.5
CAM4X25  (via drill 0.35 pad 0.86)
  Top 0.254: v40.89,82.55 39.81,83.63 J2X25.4
  Bottom 0.254: U$2X25.P14 41.3,82.14 v40.89,82.55
CAM4X31  (via drill 0.35 pad 0.86)
  Top 0.254: v65.28,6.35 64.2,7.43 J2X31.4
  Bottom 0.254: U$2X31.P14 65.69,5.94 v65.28,6.35
CAM4X32  (via drill 0.35 pad 0.86)
  Top 0.254: v65.28,25.4 64.2,26.48 J2X32.4
  Bottom 0.254: U$2X32.P14 65.69,24.99 v65.28,25.4
CAM4X33  (via drill 0.35 pad 0.86)
  Top 0.254: v65.28,44.45 64.2,45.53 J2X33.4
  Bottom 0.254: U$2X33.P14 65.69,44.04 v65.28,44.45
CAM4X34  (via drill 0.35 pad 0.86)
  Top 0.254: v65.28,63.5 64.2,64.58 J2X34.4
  Bottom 0.254: U$2X34.P14 65.69,63.09 v65.28,63.5
CAM4X35  (via drill 0.35 pad 0.86)
  Top 0.254: v65.28,82.55 64.2,83.63 J2X35.4
  Bottom 0.254: U$2X35.P14 65.69,82.14 v65.28,82.55
CAM4X41  (via drill 0.35 pad 0.86)
  Top 0.254: v89.66,6.35 88.58,7.43 J2X41.4
  Bottom 0.254: U$2X41.P14 90.07,5.94 v89.66,6.35
CAM4X42  (via drill 0.35 pad 0.86)
  Top 0.254: v89.66,25.4 88.58,26.48 J2X42.4
  Bottom 0.254: U$2X42.P14 90.07,24.99 v89.66,25.4
CAM4X43  (via drill 0.35 pad 0.86)
  Top 0.254: v89.66,44.45 88.58,45.53 J2X43.4
  Bottom 0.254: U$2X43.P14 90.07,44.04 v89.66,44.45
CAM4X44  (via drill 0.35 pad 0.86)
  Top 0.254: v89.66,63.5 88.58,64.58 J2X44.4
  Bottom 0.254: U$2X44.P14 90.07,63.09 v89.66,63.5
CAM4X45  (via drill 0.35 pad 0.86)
  Top 0.254: v89.66,82.55 88.58,83.63 J2X45.4
  Bottom 0.254: U$2X45.P14 90.07,82.14 v89.66,82.55
CAM5X11
  Top 0.254: U$2X11.P6 15.55,6.04 14.43,7.16 J2X11.5
CAM5X12
  Top 0.254: U$2X12.P6 15.55,25.09 14.43,26.21 J2X12.5
CAM5X13
  Top 0.254: U$2X13.P6 15.55,44.14 14.43,45.26 J2X13.5
CAM5X14
  Top 0.254: U$2X14.P6 15.55,63.19 14.43,64.31 J2X14.5
CAM5X15
  Top 0.254: U$2X15.P6 15.55,82.24 14.43,83.36 J2X15.5
CAM5X21
  Top 0.254: U$2X21.P6 39.93,6.04 38.81,7.16 J2X21.5
CAM5X22
  Top 0.254: U$2X22.P6 39.93,25.09 38.81,26.21 J2X22.5
CAM5X23
  Top 0.254: U$2X23.P6 39.93,44.14 38.81,45.26 J2X23.5
CAM5X24
  Top 0.254: U$2X24.P6 39.93,63.19 38.81,64.31 J2X24.5
CAM5X25
  Top 0.254: U$2X25.P6 39.93,82.24 38.81,83.36 J2X25.5
CAM5X31
  Top 0.254: U$2X31.P6 64.32,6.04 63.2,7.16 J2X31.5
CAM5X32
  Top 0.254: U$2X32.P6 64.32,25.09 63.2,26.21 J2X32.5
CAM5X33
  Top 0.254: U$2X33.P6 64.32,44.14 63.2,45.26 J2X33.5
CAM5X34
  Top 0.254: U$2X34.P6 64.32,63.19 63.2,64.31 J2X34.5
CAM5X35
  Top 0.254: U$2X35.P6 64.32,82.24 63.2,83.36 J2X35.5
CAM5X41
  Top 0.254: U$2X41.P6 88.7,6.04 87.58,7.16 J2X41.5
CAM5X42
  Top 0.254: U$2X42.P6 88.7,25.09 87.58,26.21 J2X42.5
CAM5X43
  Top 0.254: U$2X43.P6 88.7,44.14 87.58,45.26 J2X43.5
CAM5X44
  Top 0.254: U$2X44.P6 88.7,63.19 87.58,64.31 J2X44.5
CAM5X45
  Top 0.254: U$2X45.P6 88.7,82.24 87.58,83.36 J2X45.5
CAM6X11  (via drill 0.35 pad 0.86)
  Top 0.254: v13.97,6.35 13.43,6.89 J2X11.6
  Bottom 0.254: U$2X11.P13 14.18,6.14 v13.97,6.35
CAM6X12  (via drill 0.35 pad 0.86)
  Top 0.254: v13.97,25.4 13.43,25.94 J2X12.6
  Bottom 0.254: U$2X12.P13 14.18,25.19 v13.97,25.4
CAM6X13  (via drill 0.35 pad 0.86)
  Top 0.254: v13.97,44.45 13.43,44.99 J2X13.6
  Bottom 0.254: U$2X13.P13 14.18,44.24 v13.97,44.45
CAM6X14  (via drill 0.35 pad 0.86)
  Top 0.254: v13.97,63.5 13.43,64.04 J2X14.6
  Bottom 0.254: U$2X14.P13 14.18,63.29 v13.97,63.5
CAM6X15  (via drill 0.35 pad 0.86)
  Top 0.254: v13.97,82.55 13.43,83.09 J2X15.6
  Bottom 0.254: U$2X15.P13 14.18,82.34 v13.97,82.55
CAM6X21  (via drill 0.35 pad 0.86)
  Top 0.254: v38.35,6.35 37.81,6.89 J2X21.6
  Bottom 0.254: U$2X21.P13 38.56,6.14 v38.35,6.35
CAM6X22  (via drill 0.35 pad 0.86)
  Top 0.254: v38.35,25.4 37.81,25.94 J2X22.6
  Bottom 0.254: U$2X22.P13 38.56,25.19 v38.35,25.4
CAM6X23  (via drill 0.35 pad 0.86)
  Top 0.254: v38.35,44.45 37.81,44.99 J2X23.6
  Bottom 0.254: U$2X23.P13 38.56,44.24 v38.35,44.45
CAM6X24  (via drill 0.35 pad 0.86)
  Top 0.254: v38.35,63.5 37.81,64.04 J2X24.6
  Bottom 0.254: U$2X24.P13 38.56,63.29 v38.35,63.5
CAM6X25  (via drill 0.35 pad 0.86)
  Top 0.254: v38.35,82.55 37.81,83.09 J2X25.6
  Bottom 0.254: U$2X25.P13 38.56,82.34 v38.35,82.55
CAM6X31  (via drill 0.35 pad 0.86)
  Top 0.254: v62.74,6.35 62.2,6.89 J2X31.6
  Bottom 0.254: U$2X31.P13 62.95,6.14 v62.74,6.35
CAM6X32  (via drill 0.35 pad 0.86)
  Top 0.254: v62.74,25.4 62.2,25.94 J2X32.6
  Bottom 0.254: U$2X32.P13 62.95,25.19 v62.74,25.4
CAM6X33  (via drill 0.35 pad 0.86)
  Top 0.254: v62.74,44.45 62.2,44.99 J2X33.6
  Bottom 0.254: U$2X33.P13 62.95,44.24 v62.74,44.45
CAM6X34  (via drill 0.35 pad 0.86)
  Top 0.254: v62.74,63.5 62.2,64.04 J2X34.6
  Bottom 0.254: U$2X34.P13 62.95,63.29 v62.74,63.5
CAM6X35  (via drill 0.35 pad 0.86)
  Top 0.254: v62.74,82.55 62.2,83.09 J2X35.6
  Bottom 0.254: U$2X35.P13 62.95,82.34 v62.74,82.55
CAM6X41  (via drill 0.35 pad 0.86)
  Top 0.254: v87.12,6.35 86.58,6.89 J2X41.6
  Bottom 0.254: U$2X41.P13 87.33,6.14 v87.12,6.35
CAM6X42  (via drill 0.35 pad 0.86)
  Top 0.254: v87.12,25.4 86.58,25.94 J2X42.6
  Bottom 0.254: U$2X42.P13 87.33,25.19 v87.12,25.4
CAM6X43  (via drill 0.35 pad 0.86)
  Top 0.254: v87.12,44.45 86.58,44.99 J2X43.6
  Bottom 0.254: U$2X43.P13 87.33,44.24 v87.12,44.45
CAM6X44  (via drill 0.35 pad 0.86)
  Top 0.254: v87.12,63.5 86.58,64.04 J2X44.6
  Bottom 0.254: U$2X44.P13 87.33,63.29 v87.12,63.5
CAM6X45  (via drill 0.35 pad 0.86)
  Top 0.254: v87.12,82.55 86.58,83.09 J2X45.6
  Bottom 0.254: U$2X45.P13 87.33,82.34 v87.12,82.55
CAM7X11
  Top 0.254: U$2X11.P5 12.81,6.24 12.43,6.62 J2X11.7
CAM7X12
  Top 0.254: U$2X12.P5 12.81,25.29 12.43,25.67 J2X12.7
CAM7X13
  Top 0.254: U$2X13.P5 12.81,44.34 12.43,44.72 J2X13.7
CAM7X14
  Top 0.254: U$2X14.P5 12.81,63.39 12.43,63.77 J2X14.7
CAM7X15
  Top 0.254: U$2X15.P5 12.81,82.44 12.43,82.82 J2X15.7
CAM7X21
  Top 0.254: U$2X21.P5 37.19,6.24 36.81,6.62 J2X21.7
CAM7X22
  Top 0.254: U$2X22.P5 37.19,25.29 36.81,25.67 J2X22.7
CAM7X23
  Top 0.254: U$2X23.P5 37.19,44.34 36.81,44.72 J2X23.7
CAM7X24
  Top 0.254: U$2X24.P5 37.19,63.39 36.81,63.77 J2X24.7
CAM7X25
  Top 0.254: U$2X25.P5 37.19,82.44 36.81,82.82 J2X25.7
CAM7X31
  Top 0.254: U$2X31.P5 61.58,6.24 61.2,6.62 J2X31.7
CAM7X32
  Top 0.254: U$2X32.P5 61.58,25.29 61.2,25.67 J2X32.7
CAM7X33
  Top 0.254: U$2X33.P5 61.58,44.34 61.2,44.72 J2X33.7
CAM7X34
  Top 0.254: U$2X34.P5 61.58,63.39 61.2,63.77 J2X34.7
CAM7X35
  Top 0.254: U$2X35.P5 61.58,82.44 61.2,82.82 J2X35.7
CAM7X41
  Top 0.254: U$2X41.P5 85.96,6.24 85.58,6.62 J2X41.7
CAM7X42
  Top 0.254: U$2X42.P5 85.96,25.29 85.58,25.67 J2X42.7
CAM7X43
  Top 0.254: U$2X43.P5 85.96,44.34 85.58,44.72 J2X43.7
CAM7X44
  Top 0.254: U$2X44.P5 85.96,63.39 85.58,63.77 J2X44.7
CAM7X45
  Top 0.254: U$2X45.P5 85.96,82.44 85.58,82.82 J2X45.7
CAM8X11  (via drill 0.35 pad 0.86)
  Top 0.254: v11.43,6.35 J2X11.8
  Bottom 0.254: U$2X11.P12 v11.44,6.34 v11.43,6.35
CAM8X12  (via drill 0.35 pad 0.86)
  Top 0.254: v11.43,25.4 J2X12.8
  Bottom 0.254: U$2X12.P12 v11.44,25.39 v11.43,25.4
CAM8X13  (via drill 0.35 pad 0.86)
  Top 0.254: v11.43,44.45 J2X13.8
  Bottom 0.254: U$2X13.P12 v11.44,44.44 v11.43,44.45
CAM8X14  (via drill 0.35 pad 0.86)
  Top 0.254: v11.43,63.5 J2X14.8
  Bottom 0.254: U$2X14.P12 v11.44,63.49 v11.43,63.5
CAM8X15  (via drill 0.35 pad 0.86)
  Top 0.254: v11.43,82.55 J2X15.8
  Bottom 0.254: U$2X15.P12 v11.44,82.54 v11.43,82.55
CAM8X21  (via drill 0.35 pad 0.86)
  Top 0.254: v35.81,6.35 J2X21.8
  Bottom 0.254: U$2X21.P12 35.82,6.34 v35.81,6.35
CAM8X22  (via drill 0.35 pad 0.86)
  Top 0.254: v35.81,25.4 J2X22.8
  Bottom 0.254: U$2X22.P12 35.82,25.39 v35.81,25.4
CAM8X23  (via drill 0.35 pad 0.86)
  Top 0.254: v35.81,44.45 J2X23.8
  Bottom 0.254: U$2X23.P12 35.82,44.44 v35.81,44.45
CAM8X24  (via drill 0.35 pad 0.86)
  Top 0.254: v35.81,63.5 J2X24.8
  Bottom 0.254: U$2X24.P12 35.82,63.49 v35.81,63.5
CAM8X25  (via drill 0.35 pad 0.86)
  Top 0.254: v35.81,82.55 J2X25.8
  Bottom 0.254: U$2X25.P12 35.82,82.54 v35.81,82.55
CAM8X31  (via drill 0.35 pad 0.86)
  Top 0.254: v60.2,6.35 J2X31.8
  Bottom 0.254: U$2X31.P12 v60.21,6.34 v60.2,6.35
CAM8X32  (via drill 0.35 pad 0.86)
  Top 0.254: v60.2,25.4 J2X32.8
  Bottom 0.254: U$2X32.P12 v60.21,25.39 v60.2,25.4
CAM8X33  (via drill 0.35 pad 0.86)
  Top 0.254: v60.2,44.45 J2X33.8
  Bottom 0.254: U$2X33.P12 v60.21,44.44 v60.2,44.45
CAM8X34  (via drill 0.35 pad 0.86)
  Top 0.254: v60.2,63.5 J2X34.8
  Bottom 0.254: U$2X34.P12 v60.21,63.49 v60.2,63.5
CAM8X35  (via drill 0.35 pad 0.86)
  Top 0.254: v60.2,82.55 J2X35.8
  Bottom 0.254: U$2X35.P12 v60.21,82.54 v60.2,82.55
CAM8X41  (via drill 0.35 pad 0.86)
  Top 0.254: v84.58,6.35 J2X41.8
  Bottom 0.254: U$2X41.P12 84.59,6.34 v84.58,6.35
CAM8X42  (via drill 0.35 pad 0.86)
  Top 0.254: v84.58,25.4 J2X42.8
  Bottom 0.254: U$2X42.P12 84.59,25.39 v84.58,25.4
CAM8X43  (via drill 0.35 pad 0.86)
  Top 0.254: v84.58,44.45 J2X43.8
  Bottom 0.254: U$2X43.P12 84.59,44.44 v84.58,44.45
CAM8X44  (via drill 0.35 pad 0.86)
  Top 0.254: v84.58,63.5 J2X44.8
  Bottom 0.254: U$2X44.P12 84.59,63.49 v84.58,63.5
CAM8X45  (via drill 0.35 pad 0.86)
  Top 0.254: v84.58,82.55 J2X45.8
  Bottom 0.254: U$2X45.P12 84.59,82.54 v84.58,82.55
CAM9X11
  Top 0.254: U$2X11.P4 10.07,6.26 10.43,6.62 J2X11.9
CAM9X12
  Top 0.254: U$2X12.P4 10.07,25.31 10.43,25.67 J2X12.9
CAM9X13
  Top 0.254: U$2X13.P4 10.07,44.36 10.43,44.72 J2X13.9
CAM9X14
  Top 0.254: U$2X14.P4 10.07,63.41 10.43,63.77 J2X14.9
CAM9X15
  Top 0.254: U$2X15.P4 10.07,82.46 10.43,82.82 J2X15.9
CAM9X21
  Top 0.254: U$2X21.P4 34.45,6.26 34.81,6.62 J2X21.9
CAM9X22
  Top 0.254: U$2X22.P4 34.45,25.31 34.81,25.67 J2X22.9
CAM9X23
  Top 0.254: U$2X23.P4 34.45,44.36 34.81,44.72 J2X23.9
CAM9X24
  Top 0.254: U$2X24.P4 34.45,63.41 34.81,63.77 J2X24.9
CAM9X25
  Top 0.254: U$2X25.P4 34.45,82.46 34.81,82.82 J2X25.9
CAM9X31
  Top 0.254: U$2X31.P4 58.84,6.26 59.2,6.62 J2X31.9
CAM9X32
  Top 0.254: U$2X32.P4 58.84,25.31 59.2,25.67 J2X32.9
CAM9X33
  Top 0.254: U$2X33.P4 58.84,44.36 59.2,44.72 J2X33.9
CAM9X34
  Top 0.254: U$2X34.P4 58.84,63.41 59.2,63.77 J2X34.9
CAM9X35
  Top 0.254: U$2X35.P4 58.84,82.46 59.2,82.82 J2X35.9
CAM9X41
  Top 0.254: U$2X41.P4 83.22,6.26 83.58,6.62 J2X41.9
CAM9X42
  Top 0.254: U$2X42.P4 83.22,25.31 83.58,25.67 J2X42.9
CAM9X43
  Top 0.254: U$2X43.P4 83.22,44.36 83.58,44.72 J2X43.9
CAM9X44
  Top 0.254: U$2X44.P4 83.22,63.41 83.58,63.77 J2X44.9
CAM9X45
  Top 0.254: U$2X45.P4 83.22,82.46 83.58,82.82 J2X45.9
CAM10X11  (via drill 0.35 pad 0.86)
  Top 0.254: v8.89,6.35 9.43,6.89 J2X11.10
  Bottom 0.254: U$2X11.P11 8.7,6.16 v8.89,6.35
CAM10X12  (via drill 0.35 pad 0.86)
  Top 0.254: v8.89,25.4 9.43,25.94 J2X12.10
  Bottom 0.254: U$2X12.P11 8.7,25.21 v8.89,25.4
CAM10X13  (via drill 0.35 pad 0.86)
  Top 0.254: v8.89,44.45 9.43,44.99 J2X13.10
  Bottom 0.254: U$2X13.P11 8.7,44.26 v8.89,44.45
CAM10X14  (via drill 0.35 pad 0.86)
  Top 0.254: v8.89,63.5 9.43,64.04 J2X14.10
  Bottom 0.254: U$2X14.P11 8.7,63.31 v8.89,63.5
CAM10X15  (via drill 0.35 pad 0.86)
  Top 0.254: v8.89,82.55 9.43,83.09 J2X15.10
  Bottom 0.254: U$2X15.P11 8.7,82.36 v8.89,82.55
CAM10X21  (via drill 0.35 pad 0.86)
  Top 0.254: v33.27,6.35 33.81,6.89 J2X21.10
  Bottom 0.254: U$2X21.P11 33.08,6.16 v33.27,6.35
CAM10X22  (via drill 0.35 pad 0.86)
  Top 0.254: v33.27,25.4 33.81,25.94 J2X22.10
  Bottom 0.254: U$2X22.P11 33.08,25.21 v33.27,25.4
CAM10X23  (via drill 0.35 pad 0.86)
  Top 0.254: v33.27,44.45 33.81,44.99 J2X23.10
  Bottom 0.254: U$2X23.P11 33.08,44.26 v33.27,44.45
CAM10X24  (via drill 0.35 pad 0.86)
  Top 0.254: v33.27,63.5 33.81,64.04 J2X24.10
  Bottom 0.254: U$2X24.P11 33.08,63.31 v33.27,63.5
CAM10X25  (via drill 0.35 pad 0.86)
  Top 0.254: v33.27,82.55 33.81,83.09 J2X25.10
  Bottom 0.254: U$2X25.P11 33.08,82.36 v33.27,82.55
CAM10X31  (via drill 0.35 pad 0.86)
  Top 0.254: v57.66,6.35 58.2,6.89 J2X31.10
  Bottom 0.254: U$2X31.P11 57.47,6.16 v57.66,6.35
CAM10X32  (via drill 0.35 pad 0.86)
  Top 0.254: v57.66,25.4 58.2,25.94 J2X32.10
  Bottom 0.254: U$2X32.P11 57.47,25.21 v57.66,25.4
CAM10X33  (via drill 0.35 pad 0.86)
  Top 0.254: v57.66,44.45 58.2,44.99 J2X33.10
  Bottom 0.254: U$2X33.P11 57.47,44.26 v57.66,44.45
CAM10X34  (via drill 0.35 pad 0.86)
  Top 0.254: v57.66,63.5 58.2,64.04 J2X34.10
  Bottom 0.254: U$2X34.P11 57.47,63.31 v57.66,63.5
CAM10X35  (via drill 0.35 pad 0.86)
  Top 0.254: v57.66,82.55 58.2,83.09 J2X35.10
  Bottom 0.254: U$2X35.P11 57.47,82.36 v57.66,82.55
CAM10X41  (via drill 0.35 pad 0.86)
  Top 0.254: v82.04,6.35 82.58,6.89 J2X41.10
  Bottom 0.254: U$2X41.P11 81.85,6.16 v82.04,6.35
CAM10X42  (via drill 0.35 pad 0.86)
  Top 0.254: v82.04,25.4 82.58,25.94 J2X42.10
  Bottom 0.254: U$2X42.P11 81.85,25.21 v82.04,25.4
CAM10X43  (via drill 0.35 pad 0.86)
  Top 0.254: v82.04,44.45 82.58,44.99 J2X43.10
  Bottom 0.254: U$2X43.P11 81.85,44.26 v82.04,44.45
CAM10X44  (via drill 0.35 pad 0.86)
  Top 0.254: v82.04,63.5 82.58,64.04 J2X44.10
  Bottom 0.254: U$2X44.P11 81.85,63.31 v82.04,63.5
CAM10X45  (via drill 0.35 pad 0.86)
  Top 0.254: v82.04,82.55 82.58,83.09 J2X45.10
  Bottom 0.254: U$2X45.P11 81.85,82.36 v82.04,82.55
CAM11X11
  Top 0.254: U$2X11.P3 7.33,6.31 8.43,7.41 J2X11.11
CAM11X12
  Top 0.254: U$2X12.P3 7.33,25.36 8.43,26.46 J2X12.11
CAM11X13
  Top 0.254: U$2X13.P3 7.33,44.41 8.43,45.51 J2X13.11
CAM11X14
  Top 0.254: U$2X14.P3 7.33,63.46 8.43,64.56 J2X14.11
CAM11X15
  Top 0.254: U$2X15.P3 7.33,82.51 8.43,83.61 J2X15.11
CAM11X21
  Top 0.254: U$2X21.P3 31.71,6.31 32.81,7.41 J2X21.11
CAM11X22
  Top 0.254: U$2X22.P3 31.71,25.36 32.81,26.46 J2X22.11
CAM11X23
  Top 0.254: U$2X23.P3 31.71,44.41 32.81,45.51 J2X23.11
CAM11X24
  Top 0.254: U$2X24.P3 31.71,63.46 32.81,64.56 J2X24.11
CAM11X25
  Top 0.254: U$2X25.P3 31.71,82.51 32.81,83.61 J2X25.11
CAM11X31
  Top 0.254: U$2X31.P3 56.1,6.31 57.2,7.41 J2X31.11
CAM11X32
  Top 0.254: U$2X32.P3 56.1,25.36 57.2,26.46 J2X32.11
CAM11X33
  Top 0.254: U$2X33.P3 56.1,44.41 57.2,45.51 J2X33.11
CAM11X34
  Top 0.254: U$2X34.P3 56.1,63.46 57.2,64.56 J2X34.11
CAM11X35
  Top 0.254: U$2X35.P3 56.1,82.51 57.2,83.61 J2X35.11
CAM11X41
  Top 0.254: U$2X41.P3 80.48,6.31 81.58,7.41 J2X41.11
CAM11X42
  Top 0.254: U$2X42.P3 80.48,25.36 81.58,26.46 J2X42.11
CAM11X43
  Top 0.254: U$2X43.P3 80.48,44.41 81.58,45.51 J2X43.11
CAM11X44
  Top 0.254: U$2X44.P3 80.48,63.46 81.58,64.56 J2X44.11
CAM11X45
  Top 0.254: U$2X45.P3 80.48,82.51 81.58,83.61 J2X45.11
CAM12X11  (via drill 0.35 pad 0.86)
  Top 0.254: v6.1,6.35 7.43,7.68 J2X11.12
  Bottom 0.254: U$2X11.P10 5.96,6.21 v6.1,6.35
CAM12X12  (via drill 0.35 pad 0.86)
  Top 0.254: v6.1,25.4 7.43,26.73 J2X12.12
  Bottom 0.254: U$2X12.P10 5.96,25.26 v6.1,25.4
CAM12X13  (via drill 0.35 pad 0.86)
  Top 0.254: v6.1,44.45 7.43,45.78 J2X13.12
  Bottom 0.254: U$2X13.P10 5.96,44.31 v6.1,44.45
CAM12X14  (via drill 0.35 pad 0.86)
  Top 0.254: v6.1,63.5 7.43,64.83 J2X14.12
  Bottom 0.254: U$2X14.P10 5.96,63.36 v6.1,63.5
CAM12X15  (via drill 0.35 pad 0.86)
  Top 0.254: v6.1,82.55 7.43,83.88 J2X15.12
  Bottom 0.254: U$2X15.P10 5.96,82.41 v6.1,82.55
CAM12X21  (via drill 0.35 pad 0.86)
  Top 0.254: v30.48,6.35 31.81,7.68 J2X21.12
  Bottom 0.254: U$2X21.P10 30.34,6.21 v30.48,6.35
CAM12X22  (via drill 0.35 pad 0.86)
  Top 0.254: v30.48,25.4 31.81,26.73 J2X22.12
  Bottom 0.254: U$2X22.P10 30.34,25.26 v30.48,25.4
CAM12X23  (via drill 0.35 pad 0.86)
  Top 0.254: v30.48,44.45 31.81,45.78 J2X23.12
  Bottom 0.254: U$2X23.P10 30.34,44.31 v30.48,44.45
CAM12X24  (via drill 0.35 pad 0.86)
  Top 0.254: v30.48,63.5 31.81,64.83 J2X24.12
  Bottom 0.254: U$2X24.P10 30.34,63.36 v30.48,63.5
CAM12X25  (via drill 0.35 pad 0.86)
  Top 0.254: v30.48,82.55 31.81,83.88 J2X25.12
  Bottom 0.254: U$2X25.P10 30.34,82.41 v30.48,82.55
CAM12X31  (via drill 0.35 pad 0.86)
  Top 0.254: v54.86,6.35 56.2,7.68 J2X31.12
  Bottom 0.254: U$2X31.P10 54.73,6.21 v54.86,6.35
CAM12X32  (via drill 0.35 pad 0.86)
  Top 0.254: v54.86,25.4 56.2,26.73 J2X32.12
  Bottom 0.254: U$2X32.P10 54.73,25.26 v54.86,25.4
CAM12X33  (via drill 0.35 pad 0.86)
  Top 0.254: v54.86,44.45 56.2,45.78 J2X33.12
  Bottom 0.254: U$2X33.P10 54.73,44.31 v54.86,44.45
CAM12X34  (via drill 0.35 pad 0.86)
  Top 0.254: v54.86,63.5 56.2,64.83 J2X34.12
  Bottom 0.254: U$2X34.P10 54.73,63.36 v54.86,63.5
CAM12X35  (via drill 0.35 pad 0.86)
  Top 0.254: v54.86,82.55 56.2,83.88 J2X35.12
  Bottom 0.254: U$2X35.P10 54.73,82.41 v54.86,82.55
CAM12X41  (via drill 0.35 pad 0.86)
  Top 0.254: v79.25,6.35 80.58,7.68 J2X41.12
  Bottom 0.254: U$2X41.P10 79.11,6.21 v79.25,6.35
CAM12X42  (via drill 0.35 pad 0.86)
  Top 0.254: v79.25,25.4 80.58,26.73 J2X42.12
  Bottom 0.254: U$2X42.P10 79.11,25.26 v79.25,25.4
CAM12X43  (via drill 0.35 pad 0.86)
  Top 0.254: v79.25,44.45 80.58,45.78 J2X43.12
  Bottom 0.254: U$2X43.P10 79.11,44.31 v79.25,44.45
CAM12X44  (via drill 0.35 pad 0.86)
  Top 0.254: v79.25,63.5 80.58,64.83 J2X44.12
  Bottom 0.254: U$2X44.P10 79.11,63.36 v79.25,63.5
CAM12X45  (via drill 0.35 pad 0.86)
  Top 0.254: v79.25,82.55 80.58,83.88 J2X45.12
  Bottom 0.254: U$2X45.P10 79.11,82.41 v79.25,82.55
CAM13X11
  Top 0.254: U$2X11.P2 4.59,6.11 6.43,7.95 J2X11.13
CAM13X12
  Top 0.254: U$2X12.P2 4.59,25.16 6.43,27 J2X12.13
CAM13X13
  Top 0.254: U$2X13.P2 4.59,44.21 6.43,46.05 J2X13.13
CAM13X14
  Top 0.254: U$2X14.P2 4.59,63.26 6.43,65.1 J2X14.13
CAM13X15
  Top 0.254: U$2X15.P2 4.59,82.31 6.43,84.15 J2X15.13
CAM13X21
  Top 0.254: U$2X21.P2 28.97,6.11 30.81,7.95 J2X21.13
CAM13X22
  Top 0.254: U$2X22.P2 28.97,25.16 30.81,27 J2X22.13
CAM13X23
  Top 0.254: U$2X23.P2 28.97,44.21 30.81,46.05 J2X23.13
CAM13X24
  Top 0.254: U$2X24.P2 28.97,63.26 30.81,65.1 J2X24.13
CAM13X25
  Top 0.254: U$2X25.P2 28.97,82.31 30.81,84.15 J2X25.13
CAM13X31
  Top 0.254: U$2X31.P2 53.36,6.11 55.2,7.95 J2X31.13
CAM13X32
  Top 0.254: U$2X32.P2 53.36,25.16 55.2,27 J2X32.13
CAM13X33
  Top 0.254: U$2X33.P2 53.36,44.21 55.2,46.05 J2X33.13
CAM13X34
  Top 0.254: U$2X34.P2 53.36,63.26 55.2,65.1 J2X34.13
CAM13X35
  Top 0.254: U$2X35.P2 53.36,82.31 55.2,84.15 J2X35.13
CAM13X41
  Top 0.254: U$2X41.P2 77.74,6.11 79.58,7.95 J2X41.13
CAM13X42
  Top 0.254: U$2X42.P2 77.74,25.16 79.58,27 J2X42.13
CAM13X43
  Top 0.254: U$2X43.P2 77.74,44.21 79.58,46.05 J2X43.13
CAM13X44
  Top 0.254: U$2X44.P2 77.74,63.26 79.58,65.1 J2X44.13
CAM13X45
  Top 0.254: U$2X45.P2 77.74,82.31 79.58,84.15 J2X45.13
CAM14X11  (via drill 0.35 pad 0.86)
  Top 0.254: v3.3,6.35 5.46,8.51 5.46,10.13 J2X11.14
  Bottom 0.254: U$2X11.P9 3.22,6.27 v3.3,6.35
CAM14X12  (via drill 0.35 pad 0.86)
  Top 0.254: v3.3,25.4 5.46,27.56 5.46,29.18 J2X12.14
  Bottom 0.254: U$2X12.P9 3.22,25.32 v3.3,25.4
CAM14X13  (via drill 0.35 pad 0.86)
  Top 0.254: v3.3,44.45 5.46,46.61 5.46,48.23 J2X13.14
  Bottom 0.254: U$2X13.P9 3.22,44.37 v3.3,44.45
CAM14X14  (via drill 0.35 pad 0.86)
  Top 0.254: v3.3,63.5 5.46,65.66 5.46,67.28 J2X14.14
  Bottom 0.254: U$2X14.P9 3.22,63.42 v3.3,63.5
CAM14X15  (via drill 0.35 pad 0.86)
  Top 0.254: v3.3,82.55 5.46,84.71 5.46,86.33 J2X15.14
  Bottom 0.254: U$2X15.P9 3.22,82.47 v3.3,82.55
CAM14X21  (via drill 0.35 pad 0.86)
  Top 0.254: v27.69,6.35 29.84,8.51 29.84,10.13 J2X21.14
  Bottom 0.254: U$2X21.P9 27.6,6.27 v27.69,6.35
CAM14X22  (via drill 0.35 pad 0.86)
  Top 0.254: v27.69,25.4 29.84,27.56 29.84,29.18 J2X22.14
  Bottom 0.254: U$2X22.P9 27.6,25.32 v27.69,25.4
CAM14X23  (via drill 0.35 pad 0.86)
  Top 0.254: v27.69,44.45 29.84,46.61 29.84,48.23 J2X23.14
  Bottom 0.254: U$2X23.P9 27.6,44.37 v27.69,44.45
CAM14X24  (via drill 0.35 pad 0.86)
  Top 0.254: v27.69,63.5 29.84,65.66 29.84,67.28 J2X24.14
  Bottom 0.254: U$2X24.P9 27.6,63.42 v27.69,63.5
CAM14X25  (via drill 0.35 pad 0.86)
  Top 0.254: v27.69,82.55 29.84,84.71 29.84,86.33 J2X25.14
  Bottom 0.254: U$2X25.P9 27.6,82.47 v27.69,82.55
CAM14X31  (via drill 0.35 pad 0.86)
  Top 0.254: v52.07,6.35 54.23,8.51 54.23,10.13 J2X31.14
  Bottom 0.254: U$2X31.P9 51.99,6.27 v52.07,6.35
CAM14X32  (via drill 0.35 pad 0.86)
  Top 0.254: v52.07,25.4 54.23,27.56 54.23,29.18 J2X32.14
  Bottom 0.254: U$2X32.P9 51.99,25.32 v52.07,25.4
CAM14X33  (via drill 0.35 pad 0.86)
  Top 0.254: v52.07,44.45 54.23,46.61 54.23,48.23 J2X33.14
  Bottom 0.254: U$2X33.P9 51.99,44.37 v52.07,44.45
CAM14X34  (via drill 0.35 pad 0.86)
  Top 0.254: v52.07,63.5 54.23,65.66 54.23,67.28 J2X34.14
  Bottom 0.254: U$2X34.P9 51.99,63.42 v52.07,63.5
CAM14X35  (via drill 0.35 pad 0.86)
  Top 0.254: v52.07,82.55 54.23,84.71 54.23,86.33 J2X35.14
  Bottom 0.254: U$2X35.P9 51.99,82.47 v52.07,82.55
CAM14X41  (via drill 0.35 pad 0.86)
  Top 0.254: v76.45,6.35 78.61,8.51 78.61,10.13 J2X41.14
  Bottom 0.254: U$2X41.P9 76.37,6.27 v76.45,6.35
CAM14X42  (via drill 0.35 pad 0.86)
  Top 0.254: v76.45,25.4 78.61,27.56 78.61,29.18 J2X42.14
  Bottom 0.254: U$2X42.P9 76.37,25.32 v76.45,25.4
CAM14X43  (via drill 0.35 pad 0.86)
  Top 0.254: v76.45,44.45 78.61,46.61 78.61,48.23 J2X43.14
  Bottom 0.254: U$2X43.P9 76.37,44.37 v76.45,44.45
CAM14X44  (via drill 0.35 pad 0.86)
  Top 0.254: v76.45,63.5 78.61,65.66 78.61,67.28 J2X44.14
  Bottom 0.254: U$2X44.P9 76.37,63.42 v76.45,63.5
CAM14X45  (via drill 0.35 pad 0.86)
  Top 0.254: v76.45,82.55 78.61,84.71 78.61,86.33 J2X45.14
  Bottom 0.254: U$2X45.P9 76.37,82.47 v76.45,82.55
CAM15X11
  Top 0.254: U$2X11.P1 1.85,7.58 J2X11.15
CAM15X12
  Top 0.254: U$2X12.P1 1.85,26.63 J2X12.15
CAM15X13
  Top 0.254: U$2X13.P1 1.85,45.68 J2X13.15
CAM15X14
  Top 0.254: U$2X14.P1 1.85,64.73 J2X14.15
CAM15X15
  Top 0.254: U$2X15.P1 1.85,83.78 J2X15.15
CAM15X21
  Top 0.254: U$2X21.P1 26.23,7.58 J2X21.15
CAM15X22
  Top 0.254: U$2X22.P1 26.23,26.63 J2X22.15
CAM15X23
  Top 0.254: U$2X23.P1 26.23,45.68 J2X23.15
CAM15X24
  Top 0.254: U$2X24.P1 26.23,64.73 J2X24.15
CAM15X25
  Top 0.254: U$2X25.P1 26.23,83.78 J2X25.15
CAM15X31
  Top 0.254: U$2X31.P1 50.62,7.58 J2X31.15
CAM15X32
  Top 0.254: U$2X32.P1 50.62,26.63 J2X32.15
CAM15X33
  Top 0.254: U$2X33.P1 50.62,45.68 J2X33.15
CAM15X34
  Top 0.254: U$2X34.P1 50.62,64.73 J2X34.15
CAM15X35
  Top 0.254: U$2X35.P1 50.62,83.78 J2X35.15
CAM15X41
  Top 0.254: U$2X41.P1 75,7.58 J2X41.15
CAM15X42
  Top 0.254: U$2X42.P1 75,26.63 J2X42.15
CAM15X43
  Top 0.254: U$2X43.P1 75,45.68 J2X43.15
CAM15X44
  Top 0.254: U$2X44.P1 75,64.73 J2X44.15
CAM15X45
  Top 0.254: U$2X45.P1 75,83.78 J2X45.15

## Text on the board
tDocu: Estimated Clock Skew: 3.8picoseconds | Estimated Clock Skew: 3.8picoseconds | Estimated Clock Skew: 3.8picoseconds | Estimated Clock Skew: 3.8picoseconds | Estimated Clock Skew: 3.8picoseconds | Estimated Clock Skew: 3.8picoseconds | Estimated Clock Skew: 3.8picoseconds | Estimated Clock Skew: 3.8picoseconds | Estimated Clock Skew: 3.8picoseconds | Estimated Clock Skew: 3.8picoseconds | Estimated Clock Skew: 3.8picoseconds | Estimated Clock Skew: 3.8picoseconds | Estimated Clock Skew: 3.8picoseconds | Estimated Clock Skew: 3.8picoseconds | Estimated Clock Skew: 3.8picoseconds | Estimated Clock Skew: 3.8picoseconds | Estimated Clock Skew: 3.8picoseconds | Estimated Clock Skew: 3.8picoseconds | Estimated Clock Skew: 3.8picoseconds | Estimated Clock Skew: 3.8picoseconds